# Altium PCB CONN-SMD_24P-P0.40_OK-14GM024-04_2026-08-18.pcbdoc
Units mm, origin at the board's own origin, x right, y up, seen from the top; angles counter-clockwise.
Board outline 36.42 x 28.43 mm, 2 copper layers (Top Layer, Bottom Layer); 1 components, 0 nets, 28 pads, 0 vias.
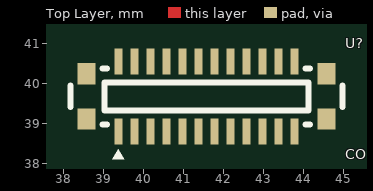
[diagram p0: Top Layer view]
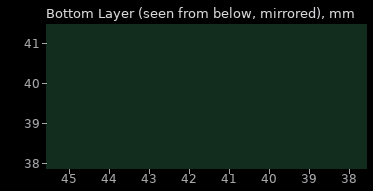
[diagram p1: Bottom Layer view, seen from below]

## Layer stack, top to bottom
Top Layer: signal copper (thickness not stored)
Dielectric: dielectric 0.32, FR-4, Dk 4.8
Bottom Layer: signal copper (thickness not stored)

## Board outline
61.816,25.4 25.4,25.4 25.4,53.829 61.816,53.829

## Components (designator, comment, footprint, x,y, rotation, side; value= is the part's Value field where it differs from the comment)
U? "CONN-SMD_24P-P0.40_OK-14GM024-04" CONN-SMD_24P-P0.40_OK-14GM024-04 41.576,39.487 r0 top

## Footprints (in the part's own frame and the unit in brackets; to place one, negate y for a bottom-side part, rotate by r counter-clockwise, add the part's x,y. Pads: shape width x height; smd on the part's side, far side on the other; paste and mask are expansions set on the pad)
CONN-SMD_24P-P0.40_OK-14GM024-04 [mm]
  rect 0.2x0.65 smd paste+0 mask+0.05: 1(-2.2,-0.687) 2(-1.8,-0.687) 3(-1.4,-0.687) 4(-1,-0.687) 5(-0.6,-0.687) 6(-0.2,-0.687) 7(0.2,-0.687) 8(0.6,-0.687) 9(1,-0.687) 10(1.4,-0.687) 11(1.8,-0.687) 12(2.2,-0.687) 13(2.2,1.062) 14(1.8,1.062) 15(1.4,1.062) 16(1,1.062) 17(0.6,1.062) 18(0.2,1.062) 19(-0.2,1.062) 20(-0.6,1.062) 21(-1,1.062) 22(-1.4,1.062) 23(-1.8,1.062) 24(-2.2,1.062)
  rect 0.45x0.53 smd paste+0 mask+0.05: 25(-3,-0.377) 26(-3,0.753) 27(3,0.753) 28(3,-0.377)
  silkscreen extent -3.4,-1.39 3.4,0.89

## Nets (pads, with @x,y where several pads share a name; then routed paths per layer and width w, separated by ;. In a path a pad name is that pad's centre, name@x,y a point inside that pad or via, vN(x,y) a via of type N, cw(c..) or ccw(c..) an arc to the next point about the centre after c; other vN are vias at no path point)
pads on no net: U?.1 U?.2 U?.3 U?.4 U?.5 U?.6 U?.7 U?.8 U?.9 U?.10 U?.11 U?.12 U?.13 U?.14 U?.15 U?.16 U?.17 U?.18 U?.19 U?.20 U?.21 U?.22 U?.23 U?.24 U?.25 U?.26 U?.27 U?.28

## Silkscreen, mask and mechanical layers (free items; w line width, h text height)
Document:
  lines w0.003: 43.608,39.614 43.608,39.615